# Altium PCB ring_rx_v3_controller.PcbDoc (part 2 of 2)
Units mil, origin at the board's own origin, x right, y up, seen from the top; angles counter-clockwise.
Board outline 1259.38 x 1096.3 mil, 2 copper layers (L1, L2), stack 62.8 mil thick; 124 components, 78 nets, 365 pads, 144 vias.
Unrouted connection lines stored in the file: 28.
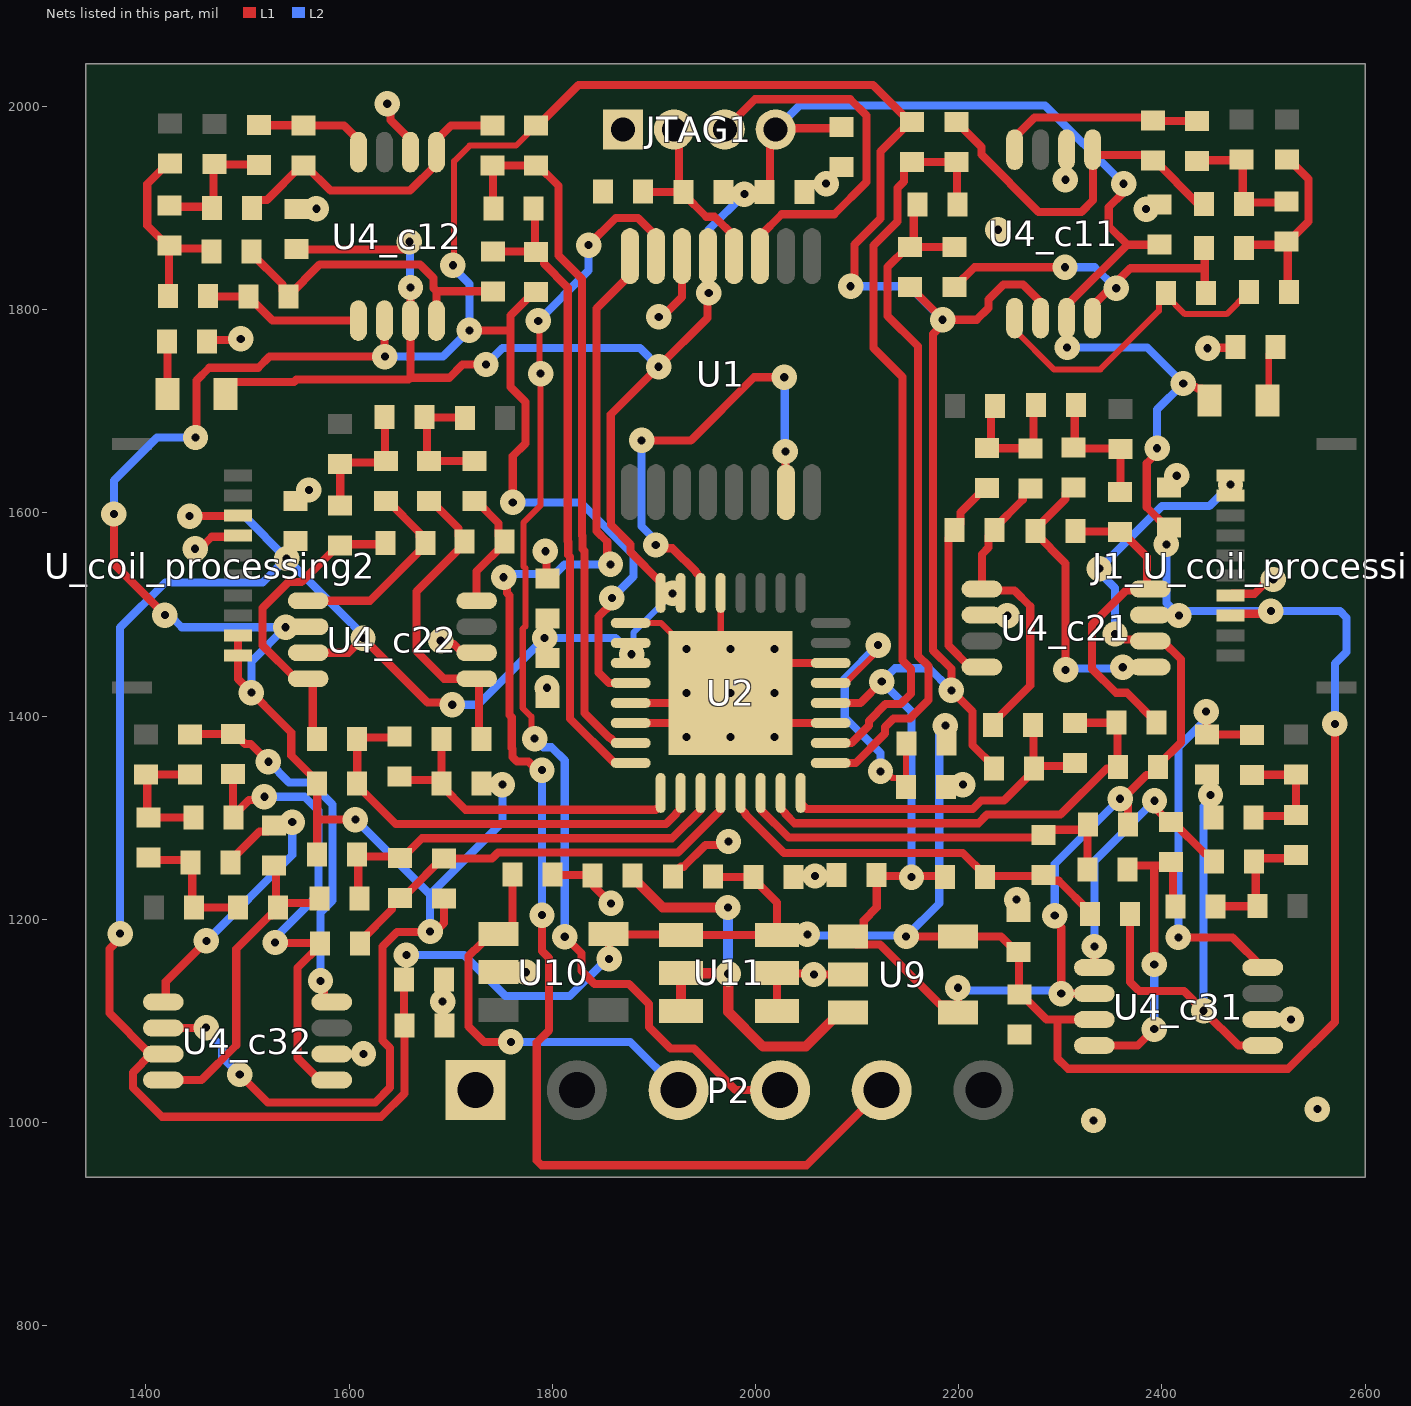
[diagram p2: the nets of this part, all layers, seen from the top]

## Via types
v1: diameter 25, hole 8, L1 to L2, 135 vias
v2: diameter 19.68, hole 7.87, L1 to L2, 9 vias

## Nets (pads, with @x,y where several pads share a name; then routed paths per layer and width w, separated by ;. In a path a pad name is that pad's centre, name@x,y a point inside that pad or via, vN(x,y) a via of type N, cw(c..) or ccw(c..) an arc to the next point about the centre after c; other vN are vias at no path point) (continued)
GND: C9.1 C10.2 C11.2 C12.2 C13.1 C14.2 C15.1 C17.2 CU1-1.1 CU1.1 CU3-1.1 CU3.1 CU4_c11.1 CU4_c12.1 CU4_c21.1 CU4_c22.1 CU4_c31.1 CU4_c32.1 J1_U_coil_processing1.4 J1_U_coil_processing2.4 JTAG1.1 P2.1 Rled1.1 Rled2.2 Rr2.1 U1.6 U2.1 U2.5 U2.6 U2.19 U2.22 U2.29 U2.33 U4_c11.6 U4_c12.6 U4_c21.6 U4_c22.6 U4_c31.6 U4_c32.6 U9.2 U10.2 U11.1 U11.2 | length 1510.9
  L1 w6: U2.1@1877.23,1491.73 1906.75,1491.73 v2(1932.35,1466.14) 1965.81,1432.68 U2.29@1965.81,1521.26 ; Rr2.1@2187.35,1330.38 2189.56,1332.59 v1(2204.15,1332.59) ; v1(2384.44,1898.99) 2384.44,1892.84 2385.5,1891.78 2390.19,1896.47 2390.66,1896.47 CU4_c11.1@2397.5,1903.32
  L1 w8: v1(1448.49,1564.76) 1453.09,1564.76 1464.87,1576.53 1489.57,1576.53 J1_U_coil_processing2.4@1490.65,1577.61 ; Rled2.2@1460.39,1768.94 1461.59,1770.14 1492.18,1770.14 v1(1493.38,1771.34) ; CU4_c12.1@1548.19,1899.33 v1(1567.82,1899.32) ; v1(1637.61,2002.73) 1640.86,1999.48 1640.86,1986.63 1660.4,1967.1 U4_c12.6@1660.4,1955.12 ; v1(1690.24,1474.13) 1693.49,1470.87 1703.03,1470.87 1711.52,1462.39 U4_c22.6@1725.56,1462.39 ; U10.2@1747.31,1147.91 v1(1774.2,1147.94) ; v1(1793.23,1562.23) 1794.37,1561.09 1794.37,1536.76 CU3-1.1@1795.51,1535.62 ; C11.2@1800.08,1243.97 1800.41,1243.64 1839.3,1243.64 C13.1@1839.63,1243.31 1840.5,1242.43 1840.5,1232.97 v1(1857.83,1215.65) ; U2.6@1877.23,1393.31 1918.57,1393.31 v2(1932.35,1379.53) ; U2.5@1877.23,1412.99 1922.5,1412.99 v2(1932.35,1422.83) ; v1(1904.85,1792.96) 1908.05,1792.96 1927.64,1812.55 U1.6@1927.64,1852.7 ; C15.1@1918.88,1241.98 1918.88,1243.95 1926.72,1251.79 1929.4,1251.79 1950.91,1273.31 1970.25,1273.31 v1(1973.5,1276.56) ; U11.1@2021.23,1109.93 U11.2@2021.23,1147.33 2022.08,1146.49 2056.66,1146.49 v1(2057.51,1145.64) 2057.56,1145.7 U9.2@2090.95,1145.7 ; v1(2058.57,1242.59) 2058.99,1243.01 2079.52,1243.01 C17.2@2079.94,1243.44 ; v1(2069.52,1924.14) 2069.52,1927.1 2082.83,1940.41 CU1.1@2084.8,1940.41 ; U2.19@2074.08,1393.31 2005.18,1393.31 v2(1975.65,1422.83) 2005.18,1452.36 U2.22@2074.08,1452.36 ; U4_c21.6@2222.91,1499.53 2223.28,1499.15 2247.6,1499.15 v1(2247.97,1498.78) ; v1(2444.99,1762.01) 2445.53,1762.56 2472.11,1762.56 Rled1.1@2472.66,1763.1 ; J1_U_coil_processing1.4@2467.44,1518.55 2469.35,1520.46 2491.03,1520.46 2505.04,1534.48 v1(2509.64,1534.48) ; U4_c31.6@2499.31,1101.31 2499.42,1101.42 2527.12,1101.42 v1(2527.22,1101.53)
  L2 w6: v2(1932.35,1422.83) v2(1975.65,1422.83) ; v2(1975.65,1379.53) v2(1975.65,1422.83) ; v2(1975.65,1466.14) v2(1975.65,1422.83) ; v2(2018.96,1422.83) v2(1975.65,1422.83)
  other v1: 2332.69,1001.96 2553.03,1013.13 1614.25,1067.52 1692.1,1118.93 2257.11,1219.34 1794.79,1427.85 1560.47,1622.6 2414.63,1636.61 2238.6,1878.71 2305.01,1927.88
  other v2: 2018.96,1379.53 2018.96,1466.14
MISO: U1.15 U2.30 | length 462
  L1 w8: v1(1887.94,1671.44) 1936.36,1671.44 1998.48,1733.56 v1(2028.29,1733.56) ; v1(1901.85,1568.41) 1905.1,1565.16 1918.41,1565.16 1941.36,1542.2 1941.36,1541.29 1946.12,1536.52 U2.30@1946.12,1521.26 ; v1(2029.48,1660.48) 2029.74,1660.22 2029.74,1620.68 U1.15@2030,1620.42
  L2 w8: v1(1887.94,1671.44) 1887.94,1586.92 1901.85,1573.01 v1(1901.85,1568.41) ; v1(2028.29,1733.56) 2028.88,1732.96 2028.88,1661.08 v1(2029.48,1660.48)
NetC3_c11_1: C3_c11.1 R6_c11.1 R7_c11.2 R9_c11.1 | length 196.3
  L1 w8: R9_c11.1@2480.61,1860.76 2483.8,1863.95 2519.41,1863.95 C3_c11.1@2522.6,1867.14 ; R6_c11.1@2523.14,1947.8 2525.11,1947.8 2544.41,1928.49 2544.41,1886.98 2524.57,1867.14 C3_c11.1@2522.6,1867.14 ; R7_c11.2@2525.2,1817.32 2523.9,1818.62 2523.9,1865.84 C3_c11.1@2522.6,1867.14
NetC3_c11_2: C3_c11.2 R3_c11.1 R4_c11.2 R8_c11.1 | length 132.2
  L1 w8: R4_c11.2@2434.57,1946.18 2435.44,1947.05 2477.71,1947.05 R3_c11.1@2478.58,1947.92 2479.59,1946.91 2479.59,1905.21 R8_c11.1@2480.61,1904.2 2481.76,1905.36 2521.45,1905.36 C3_c11.2@2522.6,1906.51
NetC3_c12_1: C3_c12.1 R6_c12.1 R7_c12.2 R9_c12.1 | length 195.4
  L1 w8: R7_c12.2@1422.01,1813.25 1422.59,1813.83 1422.59,1862.41 C3_c12.1@1423.17,1862.98 ; R6_c12.1@1423.51,1943.87 1421.54,1943.87 1401.36,1923.68 1401.36,1882.83 1421.2,1862.98 C3_c12.1@1423.17,1862.98 ; R9_c12.1@1464.62,1857.4 1461.83,1860.19 1425.96,1860.19 C3_c12.1@1423.17,1862.98
NetC3_c12_2: C3_c12.2 R3_c12.1 R4_c12.2 R8_c12.1 | length 131.1
  L1 w8: C3_c12.2@1423.17,1902.36 1424.25,1901.28 1464.21,1901.28 R8_c12.1@1465.29,1900.2 1466.47,1901.38 1466.47,1942.01 R3_c12.1@1467.65,1943.18 1467.99,1942.85 1511.12,1942.85 R4_c12.2@1511.46,1942.51
NetC3_c21_1: C3_c21.1 R6_c21.1 R7_c21.2 R9_c21.1 | length 132.6
  L1 w8: C3_c21.1@2315.59,1706.19 2314.25,1704.84 2314.25,1665.52 R7_c21.2@2312.91,1664.18 2313.62,1663.46 2358.64,1663.46 R6_c21.1@2359.35,1662.75 2359.13,1662.53 2359.13,1620.71 R9_c21.1@2358.91,1620.49
NetC3_c21_2: C3_c21.2 R3_c21.1 R4_c21.2 R8_c21.1 | length 132.5
  L1 w8: R3_c21.1@2235.91,1705.12 2231.91,1701.12 2231.91,1667.81 R4_c21.2@2227.91,1663.81 2228.01,1663.7 2270.81,1663.7 R8_c21.1@2270.91,1663.6 2273.57,1666.26 2273.57,1703.53 C3_c21.2@2276.22,1706.19
NetC3_c22_1: C3_c22.1 R6_c22.1 R7_c22.2 R9_c22.1 | length 131
  L1 w8: R9_c22.1@1591.29,1607.34 R6_c22.1@1591.29,1648.34 1592.63,1649.68 1634.95,1649.68 R7_c22.2@1636.29,1651.03 1635.54,1651.78 1635.54,1693.59 C3_c22.1@1634.79,1694.34
NetC3_c22_2: C3_c22.2 R3_c22.1 R4_c22.2 R8_c22.1 | length 129.5
  L1 w8: C3_c22.2@1674.16,1694.34 C3_c22.2@1674.66,1693.84 ; R3_c22.1@1714.29,1693.34 1713.79,1693.84 C3_c22.2@1674.66,1693.84 ; R4_c22.2@1723.29,1651.02 R8_c22.1@1678.9,1651.02 1676.53,1653.4 1676.53,1691.97 C3_c22.2@1674.66,1693.84
NetC3_c31_1: C3_c31.1 R6_c31.1 R7_c31.2 R9_c31.1 | length 130.6
  L1 w8: R9_c31.1@2452.68,1212.58 2452.93,1212.83 2493.74,1212.83 R6_c31.1@2493.99,1213.07 2492.4,1214.66 2492.4,1255.27 R7_c31.2@2490.81,1256.86 2494,1260.05 2528.94,1260.05 C3_c31.1@2532.13,1263.24
NetC3_c31_2: C3_c31.2 R3_c31.1 R4_c31.2 R8_c31.1 | length 126.4
  L1 w8: R4_c31.2@2488.59,1342.2 2488.71,1342.33 2532.01,1342.33 R3_c31.1@2532.13,1342.44 C3_c31.2@2532.13,1302.62 2531.02,1301.51 2491.18,1301.51 R8_c31.1@2490.07,1300.4
NetC3_c32_1: C3_c32.1 R6_c32.1 R7_c32.2 R9.1 | length 132.5
  L1 w8: C3_c32.1@1402.7,1260.93 1405.14,1258.48 1441.51,1258.48 R7_c32.2@1443.95,1256.04 1445.62,1254.37 1445.62,1213.44 R6_c32.1@1447.3,1211.77 R9.1@1490.9,1211.77
NetC3_c32_2: C3_c32.2 R3_c32.1 R4_c32.2 R8_c32.1 | length 131
  L1 w8: R4_c32.2@1443.43,1342.67 1443.32,1342.56 1400.12,1342.56 R3_c32.1@1400,1342.44 1401.35,1341.1 1401.35,1301.65 C3_c32.2@1402.7,1300.3 R8_c32.1@1446.9,1300.34
NetC4_c11_1: C4_c11.1 R8_c11.2 R11_c11.1 U4_c11.5 | length 360.5
  L1 w8: R11_c11.1@2197.84,1984.8 2222.42,1960.21 2222.42,1952.63 2278.71,1896.35 2320.95,1896.35 2332.31,1907.71 U4_c11.5@2332.31,1955.63 ; U4_c11.5@2331.84,1957.56 2332.31,1957.09 U4_c11.5@2332.31,1955.63 ; C4_c11.1@2391.13,1946.76 2385.73,1952.16 2335.78,1952.16 U4_c11.5@2332.31,1955.63 ; C4_c11.1@2393.1,1946.76 2435.66,1904.2 R8_c11.2@2441.24,1904.2
  L1 w10: C4_c11.1@2391.13,1946.76 C4_c11.1@2393.1,1946.76
NetC4_c11_2: C4_c11.2 R4_c11.1 U4_c11.8 | length 201.1
  L1 w8: U4_c11.8@2255.07,1957.56 2255.07,1969.53 2274.69,1989.15 2388.11,1989.15 C4_c11.2@2391.13,1986.13 2391.42,1985.84 2434.28,1985.84 R4_c11.1@2434.57,1985.55
NetC4_c12_1: C4_c12.1 R8_c12.2 R11_c12.1 U4_c12.5 | length 305.4
  L1 w8: R8_c12.2@1504.66,1900.2 1504.66,1902.17 1510.5,1908.01 1519.13,1908.01 1552.96,1941.85 C4_c12.1@1554.93,1941.85 1556.9,1941.85 1581.56,1917.18 1660.03,1917.18 1685.99,1943.14 U4_c12.5@1685.99,1955.12 1685.99,1966.85 1700.49,1981.35 R11_c12.1@1740.94,1981.35
NetC4_c12_2: C4_c12.2 R4_c12.1 U4_c12.8 | length 115.7
  L1 w8: R4_c12.1@1511.46,1981.88 1511.8,1981.55 1554.6,1981.55 C4_c12.2@1554.93,1981.22 1594.86,1981.22 1609.22,1966.85 U4_c12.8@1609.22,1955.12
NetC4_c21_1: C4_c21.1 R8_c21.2 R11_c21.1 U4_c21.5 | length 306.8
  L1 w8: R11_c21.1@2233.58,1391.38 2233.58,1393.35 2270.47,1430.24 2270.47,1508.1 2254.91,1523.66 2224.37,1523.66 U4_c21.5@2222.91,1525.12 2222.91,1559.31 2229.44,1565.84 2229.44,1577.28 C4_c21.1@2235.28,1583.12 2235.28,1585.09 2263.1,1612.91 2263.1,1618.39 2268.94,1624.23 R8_c21.2@2270.91,1624.23
NetC4_c21_2: C4_c21.2 R4_c21.1 U4_c21.8 | length 213.6
  L1 w8: U4_c21.8@2222.91,1448.35 2210.93,1448.35 2189.96,1469.32 2189.96,1575.2 2195.91,1581.15 C4_c21.2@2195.91,1583.12 2201.75,1588.96 2201.75,1600.25 2225.94,1624.43 R4_c21.1@2227.91,1624.43
NetC4_c22_1: C4_c22.1 R8_c22.2 R11_c22.1 U4_c22.5 | length 314.2
  L1 w8: R8_c22.2@1678.9,1611.65 1680.87,1611.65 1707.67,1584.85 1707.67,1577.7 C4_c22.1@1713.52,1571.86 1713.52,1569.89 1666.41,1522.78 1666.41,1463.81 1693.42,1436.8 U4_c22.5@1725.56,1436.8 1727.88,1434.48 1727.88,1380.03 R11_c22.1@1730.2,1377.71
NetC4_c22_2: C4_c22.2 R4_c22.1 U4_c22.8 | length 122.8
  L1 w8: R4_c22.1@1723.29,1611.65 1725.26,1611.65 1747.04,1589.87 1747.04,1577.7 C4_c22.2@1752.89,1571.86 1752.89,1569.89 1725.56,1542.56 U4_c22.8@1725.56,1513.57
NetC4_c31_1: C4_c31.1 R8_c31.2 R11_c31.1 U4_c31.5 | length 439.2
  L1 w8: R11_c31.1@2368.47,1205.41 2368.47,1138.2 2377.34,1129.34 2421.71,1129.34 v1(2441.11,1109.94) 2475.33,1075.72 U4_c31.5@2499.31,1075.72
  L2 w8: v1(2441.11,1109.94) 2441.11,1311.05 2447.86,1317.8 v1(2447.86,1322.4)
NetC4_c31_2: C4_c31.2 R4_c31.1 U4_c31.8 | length 395.8
  L1 w8: v1(2416.3,1182.26) 2469.55,1182.26 U4_c31.8@2499.31,1152.5 ; v1(2443.59,1404.41) 2444.08,1403.93 2444.08,1382.55 2444.8,1381.82 2488.34,1381.82 R4_c31.1@2488.59,1381.58
  L2 w8: v1(2416.3,1182.26) 2416.32,1369.65 2443.59,1396.92 v1(2443.59,1404.41)
NetC4_c32_1: C4_c32.1 R8_c32.2 R11_c32.1 U4_c32.5 | length 498
  L1 w8: C4_c32.1@1485.6,1343.05 1485.94,1342.71 1485.94,1300.68 R8_c32.2@1486.28,1300.34 1486.28,1302.31 1501.37,1317.41 1513.43,1317.41 v1(1516.68,1320.66) ; v1(1527.25,1177.14) 1527.77,1176.62 1570.68,1176.62 R11_c32.1@1571.2,1176.1 1571.2,1174.13 1549.35,1152.28 1549.35,1063.44 1570.98,1041.81 U4_c32.5@1582.95,1041.81
  L2 w8: v1(1516.68,1320.66) 1556.31,1320.66 1569.78,1307.19 1569.78,1224.27 1527.25,1181.74 v1(1527.25,1177.14)
NetC4_c32_2: C4_c32.2 R4_c32.1 U4_c32.8 | length 375.5
  L1 w8: R4_c32.1@1443.43,1382.05 1443.62,1382.23 1485.41,1382.23 C4_c32.2@1485.6,1382.42 1487.57,1382.42 1497.52,1372.46 1503.26,1372.46 v1(1520.58,1355.14) ; v1(1571.85,1139.36) 1575.1,1136.11 1575.1,1122.53 1579.05,1118.59 U4_c32.8@1582.95,1118.59
  L2 w8: v1(1520.58,1355.14) 1541.06,1334.66 1562.11,1334.66 1583.78,1312.98 1583.78,1218.48 1571.85,1206.54 v1(1571.85,1139.36)
NetC18_c11_1: C18_c11.1 R9_c11.2 R10_c11.1 U4_c11.4 | length 358.4
  L1 w8: R10_c11.1@2196.04,1822.19 2215.66,1841.82 v1(2304.62,1841.82) ; U4_c11.4@2331.84,1791.77 2331.84,1803.5 2369.2,1840.86 2442.15,1840.86 ; R9_c11.2@2441.24,1860.76 2442.25,1859.75 2442.25,1817.47 C18_c11.1@2443.26,1816.46
  L2 w8: v1(2304.62,1841.82) 2333.92,1841.82 2354.56,1821.18 v1(2355.06,1821.18)
NetC18_c11_2: C18_c11.2 R7_c11.1 U4_c11.1 | length 312.5
  L1 w6: U4_c11.1@2255.07,1791.77 2255.07,1780.04 2293.78,1741.32 2339.39,1741.32 2397.05,1798.98 2397.05,1807.65 C18_c11.2@2403.89,1814.49 ; C18_c11.2@2403.89,1816.46 C18_c11.2@2403.89,1814.49 ; R7_c11.1@2485.57,1817.58 2463.64,1795.65 2422.73,1795.65 C18_c11.2@2403.89,1814.49
NetC18_c12_1: C18_c12.1 R9_c12.2 R10_c12.1 U4_c12.4 | length 319.7
  L1 w8: R9_c12.2@1503.99,1857.4 1503.99,1855.43 1534.4,1825.02 1534.4,1818.76 C18_c12.1@1540.24,1812.92 1540.24,1813.49 1571.09,1844.33 1669.8,1844.33 1682.98,1831.15 1682.98,1821.18 1685.99,1818.16 ; U4_c12.4@1685.99,1789.33 1685.99,1818.16 ; R10_c12.1@1741.62,1818.16 1685.99,1818.16
NetC18_c12_2: C18_c12.2 R7_c12.1 U4_c12.1 | length 159.7
  L1 w8: R7_c12.1@1461.38,1811.28 R7_c12.1@1461.38,1813.25 1461.55,1813.09 1500.71,1813.09 C18_c12.2@1500.87,1812.92 1524.46,1789.33 U4_c12.1@1609.22,1789.33
NetC18_c21_1: C18_c21.1 R9_c21.2 R10_c21.1 U4_c21.4 | length 313.4
  L1 w8: C18_c21.1@2314.91,1582.12 2315.41,1581.62 2358.41,1581.62 R9_c21.2@2358.91,1581.12 2360.88,1581.12 2385.53,1556.47 U4_c21.4@2385.53,1525.12 ; U4_c21.4@2388.7,1525.12 2387.06,1523.49 2364.78,1523.49 2331.41,1490.11 2331.41,1446.36 2354.77,1423 2365.65,1423 R10_c21.1@2394.86,1393.79
NetC18_c21_2: C18_c21.2 R7_c21.1 U4_c21.1 | length 265.5
  L1 w8: v1(2305.31,1445.51) 2305.31,1550.38 2275.54,1580.15 2275.54,1584.09 2305.1,1613.65 2305.1,1618.96 2310.94,1624.81 R7_c21.1@2312.91,1624.81
  L2 w8: v1(2305.31,1445.51) 2306.6,1446.8 2360.21,1446.8 v1(2361.5,1448.09)
NetC18_c22_1: C18_c22.1 R9_c22.2 R10_c22.1 U4_c22.4 | length 305.7
  L1 w8: R10_c22.1@1568.64,1377.71 1564.21,1382.15 1564.21,1432.86 1560.26,1436.8 U4_c22.4@1559.77,1436.8 1547.79,1436.8 1514.93,1469.66 1514.93,1506.3 1540.47,1531.84 1553.19,1531.84 1589.32,1567.97 R9_c22.2@1591.29,1567.97 1592.47,1569.15 1634.73,1569.15 C18_c22.1@1635.92,1570.34
NetC18_c22_2: C18_c22.2 R7_c22.1 U4_c22.1 | length 198.8
  L1 w8: U4_c22.1@1559.77,1513.57 1620.49,1513.57 1675.29,1568.37 C18_c22.2@1675.29,1570.34 1669.45,1576.18 1669.45,1580.47 1638.26,1611.65 R7_c22.1@1636.29,1611.65
NetC18_c31_1: C18_c31.1 R9_c31.2 R10_c31.1 U4_c31.4 | length 319.1
  L1 w8: U4_c31.4@2333.53,1075.72 2376.26,1075.72 v1(2392.52,1091.98) ; R10_c31.1@2366.09,1249.23 2369.78,1252.91 2392.28,1252.91 ; v1(2392.52,1155.52) 2392.52,1252.67 2392.28,1252.91 ; R9_c31.2@2413.31,1212.58 2411.1,1214.79 2411.1,1254.39 C18_c31.1@2408.9,1256.6 2405.22,1252.91 2392.28,1252.91
  L2 w8: v1(2392.52,1091.98) v1(2392.52,1155.52) v1@2393,1156
NetC18_c31_2: C18_c31.2 R7_c31.1 U4_c31.1 | length 277.3
  L1 w8: U4_c31.1@2333.53,1152.5 v1(2333.53,1173.27) ; v1(2392.79,1316.74) 2396.04,1313.49 2396.04,1306.86 2406.93,1295.97 C18_c31.2@2408.9,1295.97 2410.87,1295.97 2442.17,1264.67 2445.6,1264.67 2451.44,1258.83 R7_c31.1@2451.44,1256.86
  L2 w8: v1(2333.53,1173.27) 2333.53,1257.48 v1(2392.79,1316.74)
NetC18_c32_1: C18_c32.1 R9.2 R10_c32.1 U4_c32.4 | length 327
  L1 w8: U4_c32.4@1417.17,1041.81 1454.81,1041.81 1489.01,1076.02 1489.01,1170.72 1522.25,1203.96 1524.43,1203.96 1530.28,1209.8 R9.2@1530.28,1211.77 ; C18_c32.1@1525.99,1252.94 1528.13,1250.8 1528.13,1213.91 R9.2@1530.28,1211.77 ; R10_c32.1@1570.69,1220.25 1566.45,1216.01 1534.52,1216.01 R9.2@1530.28,1211.77
NetC18_c32_2: C18_c32.2 R7_c32.1 U4_c32.1 | length 308.1
  L1 w8: U4_c32.1@1417.17,1118.59 1419.63,1121.05 1419.63,1138.85 v1(1459.57,1178.79) ; R7_c32.1@1483.33,1256.04 1483.33,1258.01 1511.78,1286.47 1520.15,1286.47 C18_c32.2@1525.99,1292.31 1527.69,1294.02 1542.42,1294.02 v1(1544.13,1295.72)
  L2 w8: v1(1459.57,1178.79) 1544.13,1263.35 v1(1544.13,1295.72)
NetDS1_2: DS1.2 Rled1.2 | length 55.8
  L1 w6: DS1.2@2503.82,1710.67 2505.18,1712.03 2505.18,1756.26 Rled1.2@2512.03,1763.1
NetDS2_2: DS2.2 Rled2.1 | length 51.9
  L1 w8: Rled2.1@1421.02,1768.94 1421.14,1768.83 1421.14,1717.27 DS2.2@1421.25,1717.15
NetRr1_2: Rr1.2 Rr2.2 U2.21 | length 285.4
  L1 w6: U2.21@2074.08,1432.68 2088.9,1432.68 2119.61,1463.38 v1@2119.61,1464.48 ; v1(2123.08,1345.59) 2128.22,1345.59 2134.62,1339.19 2141.14,1339.19 Rr2.2@2147.98,1332.35 ; Rr2.2@2147.98,1330.38 Rr2.2@2147.98,1332.35 ; Rr1.2@2148.8,1373.14 2147.98,1372.32 Rr2.2@2147.98,1332.35
  L2 w8: v1(2120.77,1469.89) 2087.83,1436.95 2087.83,1398.86 2123.08,1363.61 v1(2123.08,1345.59)
RST: C9.2 JTAG1.2 R5.1 U1.4 | length 194
  L1 w8: C9.2@1889.16,1916.12 1889.34,1915.94 R5.1@1929.13,1915.94 ; JTAG1.2@1919.82,1977.44 1924.57,1972.69 1924.57,1920.51 R5.1@1929.13,1915.94 ; U1.4@1978.82,1852.7 1978.82,1872.48 1959.77,1891.53 1951.57,1891.53 1929.31,1913.79 R5.1@1929.31,1915.76 R5.1@1929.13,1915.94
RX: P2.4 U1.7 | length 1139.9
  L1 w6: v1@1779.33,1381.15 1779.42,1381.24 1779.42,1399.4 1770.95,1407.87 1770.95,1485.8 1773.61,1488.46 1773.61,1545.52 1771.73,1547.4 1771.73,1590.64 1788.53,1607.44 v1(1788.53,1737.05) 1787.37,1738.21 1787.37,1787.85 v1(1786.21,1789.01)
  L1 w8: v1@1779.33,1381.15 v1(1782.58,1377.9) ; v1(1812.35,1182.84) 1828.6,1166.59 1828.6,1149.39 1841.64,1136.35 1875.37,1136.35 1895.09,1116.63 1895.09,1093.98 1916.35,1072.71 1939.33,1072.71 1980.19,1031.85 P2.4@2024.29,1031.85 ; v1(1835.77,1863.51) 1862.52,1890.26 1884.27,1890.26 1902.05,1872.48 U1.7@1902.05,1852.7
  L2 w8: v1(1782.58,1377.9) 1791.08,1369.4 1799.17,1369.4 1812.35,1356.22 v1(1812.35,1182.84) v1@1815.6,1179.59 ; v1(1786.21,1789.01) 1835.77,1838.57 v1(1835.77,1863.51)
SIGN_c1: C8_c12.1 C16_c12.2 R11_c12.2 U2.7 | length 703.2
  L1 w8: C8_c12.1@1742.29,1899.52 1741.62,1900.19 1741.62,1941.31 R11_c12.2@1740.94,1941.98 C16_c12.2@1784.08,1941.98 1786.05,1941.98 1806,1922.03 1806,1853.35 1829.18,1830.17 1829.18,1577.9 1829.73,1577.35 1829.73,1564.4 1831.61,1562.51 1831.61,1403.5 ; 1831.69,1402.98 1856.28,1378.39 1857.2,1378.39 1861.96,1373.62 U2.7@1877.23,1373.62
SIGN_c2: C8_c22.1 C16_c22.2 R11_c22.2 U2.9 | length 329.7
  L1 w8: C8_c22.1@1649.52,1340.71 1653.02,1337.21 1687.33,1337.21 C16_c22.2@1690.83,1333.71 ; R11_c22.2@1690.83,1377.71 C16_c22.2@1690.83,1333.71 ; U2.9@1906.75,1324.41 1906.75,1312.75 1901.79,1307.79 1714.78,1307.79 1690.83,1331.74 C16_c22.2@1690.83,1333.71
SIGN_c3: C8_c32.1 C16_c32.2 R11_c32.2 U2.12 | length 430.3
  L1 w8: R11_c32.2@1610.58,1176.1 1610.58,1178.07 1642.44,1209.93 1642.44,1214.91 1648.28,1220.75 C8_c32.1@1650.25,1220.75 1656.09,1226.59 1658.46,1226.59 1691.6,1259.73 1740.67,1259.73 1746.73,1265.79 1923.6,1265.79 1965.46,1307.65 1965.46,1324.06 U2.12@1965.81,1324.41
SIGN_c4: C8_c11.1 C16_c11.2 R11_c11.2 U2.18 | length 743.2
  L1 w8: U2.18@2074.08,1373.62 2094.6,1373.62 2111.71,1390.73 2111.71,1395.35 2128.16,1411.79 2142.78,1411.79 2153.03,1422.04 2153.03,1446.41 2144.61,1454.82 2144.61,1733.67 2116.14,1762.14 2116.14,1863.14 2139.72,1886.72 2139.72,1919.63 2146.3,1926.21 2146.3,1939.58 2152.14,1945.42 C16_c11.2@2154.11,1945.42 R11_c11.2@2197.84,1945.42 2198.39,1944.88 2198.39,1904.22 C8_c11.1@2198.93,1903.68
SIGN_c5: C8_c21.1 C16_c21.2 R11_c21.2 U2.16 | length 345.6
  L1 w8: U2.16@2044.55,1324.41 2044.55,1314.5 2050.48,1308.57 2213.84,1308.57 2222.25,1316.98 2244.68,1316.98 2274.04,1346.35 C16_c21.2@2274.04,1348.32 ; R11_c21.2@2272.95,1391.38 2273.5,1390.84 2273.5,1348.86 C16_c21.2@2274.04,1348.32 ; C8_c21.1@2314.46,1353.69 2311.77,1351.01 2276.73,1351.01 C16_c21.2@2274.04,1348.32
SIGN_c6: C8_c31.1 C16_c31.2 R11_c31.2 U2.13 | length 406.7
  L1 w8: U2.13@1985.49,1324.41 1985.49,1309.15 1990.26,1304.38 1990.26,1303.24 2028.25,1265.25 2204.02,1265.25 2225.84,1243.43 C16_c31.2@2225.84,1241.46 2227,1242.62 2282.11,1242.62 C8_c31.1@2283.26,1243.77 2289.1,1237.93 2298.56,1237.93 2329.1,1207.38 R11_c31.2@2329.1,1205.41
SIGP_c1: C5_c12.1 C8_c12.2 R10_c12.2 U2.8 | length 637.9
  L1 w8: R10_c12.2@1741.62,1857.54 1742.03,1857.13 C5_c12.1@1783.66,1857.13 ; C8_c12.2@1781.66,1899.52 1782.87,1898.32 1782.87,1857.92 C5_c12.1@1783.66,1857.13 ; U2.8@1877.23,1354.29 1860.58,1354.29 1817.45,1397.42 1817.45,1556.88 1815.73,1558.6 1815.73,1571.55 1815.18,1572.1 1815.18,1822.04 1791.88,1845.33 1791.88,1850.88 1786.04,1856.72 C5_c12.1@1784.07,1856.72 C5_c12.1@1783.66,1857.13
SIGP_c2: C5_c22.1 C8_c22.2 R10_c22.2 U2.10 | length 444.8
  L1 w8: C8_c22.2@1649.52,1380.08 1648.33,1378.9 1609.2,1378.9 R10_c22.2@1608.01,1377.71 C5_c22.1@1608.01,1333.71 1608.01,1331.74 1645.96,1293.79 1912,1293.79 1921.68,1303.47 1921.68,1304.38 1926.44,1309.15 U2.10@1926.44,1324.41
SIGP_c3: C5_c32.1 C8_c32.2 R10_c32.2 U2.11 | length 418.9
  L1 w8: C5_c32.1@1608.04,1263.88 C5_c32.1@1609.05,1262.86 ; R10_c32.2@1610.07,1220.25 1609.05,1221.27 C5_c32.1@1609.05,1262.86 ; U2.11@1946.12,1324.41 1945.77,1324.06 1945.77,1307.76 1917.8,1279.79 1671.89,1279.79 1652.22,1260.12 C8_c32.2@1650.25,1260.12 1648.37,1262 1609.91,1262 C5_c32.1@1609.05,1262.86
SIGP_c4: C5_c11.1 C8_c11.2 R10_c11.2 U2.17 | length 687.8
  L1 w8: U2.17@2074.08,1353.94 2098.75,1353.94 2127.6,1382.79 2127.6,1389.46 2135.87,1397.73 2152.24,1397.73 2170.24,1415.73 2170.24,1449.15 2160.05,1459.35 2160.05,1764.04 2130.14,1793.95 2130.14,1842.08 2149.98,1861.92 C5_c11.1@2151.95,1861.92 ; C8_c11.2@2159.56,1903.68 2155.75,1899.88 2155.75,1865.73 C5_c11.1@2151.95,1861.92 ; R10_c11.2@2196.04,1861.57 2195.86,1861.74 2152.13,1861.74 C5_c11.1@2151.95,1861.92
SIGP_c5: C5_c21.1 C8_c21.2 R10_c21.2 U2.15 | length 460.3
  L1 w8: U2.15@2024.87,1324.41 2024.87,1309.15 2029.63,1304.38 2029.63,1303.47 2038.53,1294.57 2219.64,1294.57 2228.05,1302.98 2300.22,1302.98 2345.79,1348.55 C5_c21.1@2357.03,1348.55 ; C8_c21.2@2314.46,1393.06 2314.82,1393.43 2355.13,1393.43 R10_c21.2@2355.49,1393.79 ; R10_c21.2@2355.49,1391.82 2356.26,1391.05 2356.26,1352.88 2357.03,1352.11 C5_c21.1@2357.03,1349.87
SIGP_c6: C5_c31.1 C8_c31.2 R10_c31.2 U2.14 | length 398.9
  L1 w8: U2.14@2005.18,1324.41 2005.53,1324.06 2005.53,1307.76 2032.73,1280.57 2280.69,1280.57 2288.32,1288.2 2322.15,1288.2 C5_c31.1@2326.97,1293.02 ; R10_c31.2@2326.72,1249.23 2326.97,1249.47 C5_c31.1@2326.97,1293.02 ; C5_c31.1@2327.21,1293.26 C5_c31.1@2326.97,1293.02
TEST: JTAG1.3 U1.3 | length 370.4
  L1 w8: JTAG1.3@1969.82,1977.44 1999.51,2007.13 2093.25,2007.13 2109.12,1991.26 2109.12,1925.52 2077.54,1893.95 2025.88,1893.95 2004.41,1872.48 U1.3@2004.41,1852.7
TX: P2.5 U1.8 | length 1416.8
  L1 w8: v1@1756.59,1536.61 v1(1752.11,1536.61) 1755.36,1533.36 1755.36,1521.33 1757.93,1518.76 1757.93,1401.09 1760.08,1398.94 1760.08,1368.58 1760.9,1367.76 1760.9,1359.67 1765.17,1355.4 1776.75,1355.4 1785.25,1346.9 v1(1789.85,1346.9) ; v1(1789.85,1204.19) 1789.85,1168.88 1796.83,1161.91 1796.83,1090.75 1784.76,1078.69 1784.76,962.6 1789.45,957.92 2050.36,957.92 P2.5@2124.29,1031.85 ; v1(1857.34,1549.28) 1854.09,1552.53 1854.09,1571.6 1843.6,1582.09 1843.6,1801.14 1876.46,1834 U1.8@1876.46,1852.7
  L2 w8: v1(1752.11,1536.61) 1755.23,1539.73 1802.55,1539.73 1812.1,1549.28 v1(1857.34,1549.28) ; v1(1789.85,1204.19) v1(1789.85,1346.9)
V1.2: C5_c11.2 C5_c12.2 C5_c21.2 C5_c22.2 C5_c31.2 C5_c32.2 C16_c11.1 C16_c12.1 C16_c21.1 C16_c22.1 C16_c31.1 C16_c32.1 C17.1 J1_U_coil_processing1.9 J1_U_coil_processing1.10 J1_U_coil_processing2.9 J1_U_coil_processing2.10 U2.4 U2.20 U4_c11.2 U4_c12.2 U4_c21.2 U4_c22.2 U4_c31.2 U4_c32.2 U9.1 U9.4 | length 5593.1
  L1 w6: v1@1703.34,1844.83 1703.34,1946.34 1718.57,1961.56 1764.29,1961.56 C16_c12.1@1784.08,1981.35 ; v1@2118.79,1430.31 2122.44,1433.97 v1(2124.27,1433.97) ; U4_c11.2@2280.52,1791.91 U4_c11.2@2280.66,1791.77
  L1 w8: v1(1368.57,1598.9) 1368.57,1549.57 v1(1418.69,1499.45) ; U4_c32.2@1417.17,1093 1417.34,1093.17 1459.07,1093.17 v1(1459.24,1093.34) ; v1(1448.84,1674.18) 1449.8,1675.14 1449.8,1730.31 1462.39,1742.9 1510.59,1742.9 1521.52,1753.83 v1(1635.23,1753.83) 1635.02,1754.04 1635.02,1789.12 U4_c12.2@1634.81,1789.33 ; J1_U_coil_processing2.9@1490.65,1473.65 J1_U_coil_processing2.10@1490.65,1459.5 1490.65,1436.47 1543.08,1384.03 1543.08,1361.24 1568.64,1335.68 C5_c22.2@1568.64,1333.71 1568.65,1298.07 ; v1(1492.45,1047.26) 1520,1019.71 1625.72,1019.71 1640.36,1034.35 1640.36,1073.16 1632.88,1080.64 1632.88,1173.22 1647.05,1187.39 1684.75,1187.39 1693.57,1196.21 C16_c32.1@1693.57,1220.36 ; C5_c32.2@1568.66,1263.88 1568.65,1298.07 ; v1(1606.28,1298.07) 1568.65,1298.07 ; v1(1702.24,1843.72) v1@1703.34,1844.83 ; v1(1718.4,1779.67) 1758.86,1779.67 1759.05,1779.86 ; v1(1761.06,1610.38) 1761.06,1655.91 1773.5,1668.36 1773.5,1709.29 1759.05,1723.75 1759.05,1779.86 ; C5_c12.2@1784.07,1817.35 1782.1,1817.35 1759.05,1794.3 1759.05,1779.86 ; C16_c12.1@1784.08,1981.35 1786.05,1981.35 1825.82,2021.13 2115.81,2021.13 C16_c11.1@2152.14,1984.8 ; v1(1858.62,1516.29) 1858.62,1510.89 1845.68,1497.95 1845.68,1442.73 1855.73,1432.68 U2.4@1877.23,1432.68 ; U2.20@2074.43,1413.34 U2.20@2074.08,1412.99 2103.29,1412.99 v1(2124.27,1433.97) ; v1(2093.64,1823.06) 2097.45,1826.87 2097.45,1864.25 2123.12,1889.91 2123.12,1955.77 C16_c11.1@2152.14,1984.8 ; C5_c11.2@2151.95,1822.55 2184.33,1790.17 2217.79,1790.17 2229.23,1801.62 2229.23,1809.95 2244.08,1824.79 2263.34,1824.79 2280.52,1807.61 U4_c11.2@2280.52,1791.91 ; v1(2153.58,1241.58) v1@2154.45,1242.45 ; C16_c11.1@2154.11,1984.8 C16_c11.1@2152.14,1984.8 ; v1(2184.16,1790.11) 2184.16,1785.51 2174.64,1775.99 2174.64,1464.72 2192.77,1446.59 v1(2192.77,1425.38) 2213.66,1404.49 2213.66,1371.3 2234.67,1350.29 C16_c21.1@2234.67,1348.32 C16_c21.1@2230.8,1352.19 ; C16_c31.1@2186.47,1241.46 2185.48,1242.45 v1@2154.45,1242.45 ; v1(2199.22,1132.61) U9.4@2199.22,1108.3 2191.41,1116.11 2181.82,1116.11 2122.64,1175.29 2098.76,1175.29 U9.1@2090.95,1183.1 2098.82,1183.1 2106.64,1190.91 2106.64,1198.79 2119.32,1211.46 C17.1@2119.32,1243.44 2120.3,1242.45 v1@2154.45,1242.45 ; 2301.02,1192.23 v1(2301.02,1126.91) U4_c31.2@2333.53,1126.91 ; v1(2358.88,1318.61) 2366.58,1318.61 C5_c31.2@2366.58,1293.26 ; v1@2363.73,1475.57 2387.06,1475.57 U4_c21.2@2388.7,1473.94 2400.67,1473.94 2418.7,1455.91 2418.7,1374.13 2396.4,1351.83 C5_c21.2@2396.4,1349.87 2396.4,1347.9 2390.56,1342.05 2385.02,1342.05 2365.78,1322.82 v1@2365.78,1319.41 ; J1_U_coil_processing1.9@2467.44,1616.98 J1_U_coil_processing1.10@2467.44,1636.66
  L2 w6: v1@2191.47,1426.68 v1(2192.77,1425.38)
  L2 w8: v1(1368.57,1598.9) 1368.57,1631.97 1410.78,1674.18 v1(1448.84,1674.18) ; v1(1418.69,1499.45) 1423.29,1499.45 1435.29,1487.44 v1(1537.53,1487.44) 1503.88,1453.79 v1(1503.88,1423.11) ; v1(1459.24,1093.34) 1459.24,1090.45 1475.12,1074.57 1475.12,1064.59 v1(1492.45,1047.26) ; v1(1606.28,1298.07) 1679.82,1224.54 ; v1(1635.23,1753.83) 1692.56,1753.83 v1@1713.8,1775.07 ; v1(1679.82,1187.98) 1679.82,1224.54 ; v1(1702.24,1843.72) 1702.24,1841.39 1718.4,1825.23 v1(1718.4,1779.67) ; v1(1750.9,1332.53) 1750.9,1295.62 1679.82,1224.54 ; v1(1761.06,1610.38) 1828.06,1610.38 1879.84,1558.6 1879.84,1537.51 v1(1858.62,1516.29) ; v1(2093.64,1823.06) 2151.21,1823.06 v1(2184.16,1790.11) ; v1(2124.27,1433.97) 2137.44,1447.14 2171.01,1447.14 v1@2191.47,1426.68 ; v1@2132.85,1425.38 2153.58,1404.65 v1(2153.58,1241.58) ; v1(2199.22,1132.61) 2202.07,1129.76 2298.17,1129.76 v1(2301.02,1126.91) ; v1(2294.62,1203.65) 2294.62,1254.35 v1(2358.88,1318.61) ; v1(2353.91,1480.79) 2353.91,1525.97 2338.47,1541.41 v1(2338.47,1545.19) 2400.2,1606.92 2446.7,1606.92 v1(2467.59,1627.81)
VCC: C10.1 C12.1 C14.1 C15.2 CU1-1.2 CU1.2 CU3-1.2 CU3.2 CU4_c11.2 CU4_c12.2 CU4_c21.2 CU4_c22.2 CU4_c31.2 CU4_c32.2 DS1.1 DS2.1 J1_U_coil_processing1.3 J1_U_coil_processing2.3 JTAG1.4 R5.2 Rr1.1 U1.5 U2.2 U2.3 U2.31 U2.32 U4_c11.3 U4_c12.3 U4_c21.3 U4_c22.3 U4_c31.3 U4_c32.3 U9.5 U10.5 U11.3 U11.4 | length 6298.3
  L1 w6: U4_c32.3@1404.25,1067.4 1405.19,1067.4 U4_c32.3@1417.17,1067.4 ; v1(2186.96,1390.59) 2186.96,1374.35 Rr1.1@2188.17,1373.14
  L1 w8: v1(1374.67,1185.93) 1374.67,1181.33 1364.03,1170.7 1364.03,1107.63 U4_c32.3@1404.25,1067.4 ; U4_c32.3@1405.19,1067.4 1387.17,1049.38 1387.17,1034.25 1415.76,1005.66 1631.6,1005.66 1654.4,1028.46 CU4_c32.2@1654.4,1095.49 1654.21,1095.69 1654.21,1140.38 C10.1@1654.01,1140.58 ; v1(1443.08,1596.78) 1443.33,1597.04 1490.39,1597.04 J1_U_coil_processing2.3@1490.65,1597.29 ; v1@1447.26,1596.78 v1@1450.22,1593.82 ; DS2.1@1478.34,1717.15 1478.34,1721.09 1486.15,1728.9 1545.63,1728.9 1548.06,1731.33 1658.65,1731.33 1660.4,1733.08 ; CU4_c22.2@1541.45,1578.18 CU4_c22.2@1547.29,1572.34 ; CU4_c12.2@1548.19,1859.95 1549,1859.14 1654.65,1859.14 1659.34,1863.83 v1(1659.34,1866.83) ; U4_c22.3@1559.77,1462.39 1599.33,1462.39 v1(1613.74,1476.8) 1677.19,1413.35 1699.41,1413.35 v1(1701.55,1411.21) ; v1(1660.48,1821.83) 1660.44,1821.79 1660.44,1789.37 U4_c12.3@1660.4,1789.33 1660.4,1733.08 ; v1(1734.74,1746.1) 1711.68,1746.1 1698.66,1733.08 1660.4,1733.08 ; v1(1792.45,1476.89) v1@1793.81,1475.53 ; U10.5@1855.57,1185.31 U10.5@1855.86,1185.02 ; v1(1855.94,1161) 1855.94,1184.94 U10.5@1855.86,1185.02 ; U2.3@1877.23,1452.36 U2.2@1877.23,1472.05 U2.2@1877.58,1472.4 ; U2.32@1906.75,1535.53 U2.32@1906.75,1531.69 ; U2.31@1926.79,1520.91 U2.31@1926.44,1521.26 U2.32@1906.75,1521.26 U2.32@1906.75,1531.69 ; v1(1953.99,1816.44) 1952.78,1815.23 1952.78,1791.94 v1(1904.72,1743.88) 1857.6,1696.76 1857.6,1593.9 1857.73,1593.78 1857.73,1588.37 1877.05,1569.05 1877.05,1561.39 U2.32@1906.75,1531.69 ; C15.2@1958.25,1241.98 1958.41,1241.82 1997.88,1241.82 C14.1@1998.04,1241.65 1998.04,1239.68 2021.23,1216.49 U11.3@2021.23,1184.73 U11.4@1926.75,1184.73 1926.46,1185.02 U10.5@1855.86,1185.02 ; R5.2@1968.68,1915.76 1968.68,1913.79 1970.65,1915.76 v1@1989.04,1915.76 ; v1(1989.04,1913.81) v1@1989.04,1915.76 ; CU1.2@2084.8,1979.78 2083.63,1978.61 2023.69,1978.61 2022.34,1979.96 JTAG1.4@2019.82,1977.44 2014.35,1971.96 2014.35,1921.23 CU1-1.2@2008.87,1915.76 v1@1989.04,1915.76 ; v1(2148.25,1183.1) U9.5@2199.22,1183.1 2241.69,1183.1 2256.96,1167.83 C12.1@2258.93,1167.83 2259.34,1167.42 2259.34,1126.47 CU4_c31.2@2259.74,1126.07 2261.71,1126.07 2286.46,1101.31 2297.35,1101.31 ; U4_c11.3@2306.25,1791.77 2306.51,1791.51 2306.51,1763.09 v1(2306.78,1762.82) ; U4_c11.3@2306.25,1804.19 2366.01,1863.94 ; U4_c31.3@2333.53,1101.31 2297.35,1101.31 ; v1(2362.34,1923.93) 2362.34,1915.48 2347.76,1900.9 2347.76,1882.19 2366.01,1863.94 ; v1(2395.33,1663.68) 2395.33,1659.08 2385.1,1648.85 2385.1,1605.59 2405.65,1585.04 2405.65,1570.28 v1(2404.39,1569.02) ; CU4_c11.2@2397.5,1863.94 2366.01,1863.94 ; 2433.3,1724.1 2434.99,1722.42 2438.92,1722.42 2446.73,1714.61 DS1.1@2446.73,1710.67 ; J1_U_coil_processing1.3@2467.44,1498.87 2469.35,1500.77 2504.76,1500.77 v1(2507.34,1503.36) ; v1(2570.26,1392.38) 2570.26,1098.94 2524.26,1052.94 2307.45,1052.94 2297.35,1063.04 2297.35,1101.31
  L2 w6: v1(1878.05,1460.9) 1880.04,1462.89 1880.04,1482.4 v1(1918.43,1520.79) ; JTAG1.4@2019.82,1977.44 JTAG1.4@2021.56,1979.18
  L2 w8: v1(1374.67,1185.93) 1374.67,1487.25 1419.07,1531.65 1515.04,1531.65 v1(1538.54,1555.15) ; v1(1443.08,1596.78) 1496.91,1596.78 v1(1538.54,1555.15) ; v1(1613.74,1476.8) 1613.74,1479.95 v1(1538.54,1555.15) ; v1(1656.37,1164.89) 1713.31,1164.89 1753.85,1124.35 1817.18,1124.35 1853.83,1161 v1(1855.94,1161) ; v1(1659.34,1866.83) 1659.91,1866.26 v1@1659.91,1821.83 ; v1(1701.55,1411.21) 1726.77,1411.21 v1(1792.45,1476.89) 1862.06,1476.89 v1(1878.05,1460.9) ; v1(1734.74,1746.1) 1750.97,1762.33 1886.27,1762.33 v1(1904.72,1743.88) ; v1(1953.99,1816.44) 1953.99,1878.76 v1(1989.04,1913.81) ; JTAG1.4@2021.56,1979.18 2043.51,2001.12 2285.15,2001.12 v1(2362.34,1923.93) ; v1(2051.05,1185.13) 2052.07,1184.12 2147.24,1184.12 v1(2148.25,1183.1) 2180.89,1215.74 2180.89,1384.52 v1(2186.96,1390.59) ; v1(2306.78,1762.82) 2385.6,1762.82 v1(2421.07,1727.36) 2395.33,1701.62 v1(2395.33,1663.68) ; v1(2404.39,1569.02) 2404.39,1511.45 v1(2416.8,1499.04) 2421.13,1503.36 v1(2507.34,1503.36) 2575.16,1503.36 2581.73,1496.79 2581.73,1463.21 2570.26,1451.74 v1(2570.26,1392.38)
VReg: C13.2 U9.3 U11.5 U11.6 | length 442.1
  L1 w10: C13.2@1879,1243.31 1879,1241.34 1908.68,1211.66 v1(1972.8,1211.66) v1@1974.06,1211.66 ; U11.6@1926.75,1109.93 U11.5@1926.75,1147.33 1927.18,1146.89 1972.7,1146.89 v1(1973.14,1146.46) 1973.14,1109 2007.32,1074.82 2049.6,1074.82 2083.08,1108.3 U9.3@2090.95,1108.3
  L2 w10: v1(1972.8,1211.66) 1972.97,1211.49 1972.97,1146.63 v1(1973.14,1146.46)
VUSB: C11.1 P2.3 U10.1 | length 408
  L1 w8: v1(1759.3,1079.36) 1732.78,1079.36 1717.62,1094.51 1717.62,1163.86 1723.48,1169.72 1723.84,1169.72 1739.43,1185.31 U10.1@1747.31,1185.31 1752.9,1185.31 1760.71,1193.12 C11.1@1760.71,1243.97
  L2 w8: v1(1759.3,1079.36) 1876.78,1079.36 P2.3@1924.29,1031.85
pads on no net: J1_U_coil_processing1.MP1 J1_U_coil_processing1.MP2 J1_U_coil_processing2.MP1 J1_U_coil_processing2.MP2 P2.2 P2.6 U1.2 U1.9 U1.14 U1.16 U2.28 U4_c11.7 U4_c12.7 U4_c21.7 U4_c22.7 U4_c31.7 U4_c32.7 U10.3 U10.4

## Polygon pours and split planes (outlines as drawn)
GND on L1 "GND Plan" (solid, pour order 9): 1344.89,2037.48 2595.24,2037.48 2600,946 1344.89,951.11
GND on L2 "GND Plan" (solid, pour order 10): 1344.7,2037.4 2595.03,2037.4 2600,946 1344.7,951.3

## Silkscreen, mask and mechanical layers (free items; w line width, h text height)
Top Overlay:
  text "MagRing / Controller  / V0.3" at 2353.82,944.17 h20
Mechanical 1:
  the board outline again, w10

## Text inside footprints (layer, text, board x,y; h text height)
U4_c11: 3D Body Top "Cap" at 1746.71,1123.28 h18